# Altium PCB TEC_Laser.PcbDoc
Units mil, origin at the board's own origin, x right, y up, seen from the top; angles counter-clockwise.
Board outline 826.77 x 1181.1 mil, 2 copper layers (Top Layer, Bottom Layer), stack 61.756 mil thick; 48 components, 34 nets, 140 pads, 41 vias.
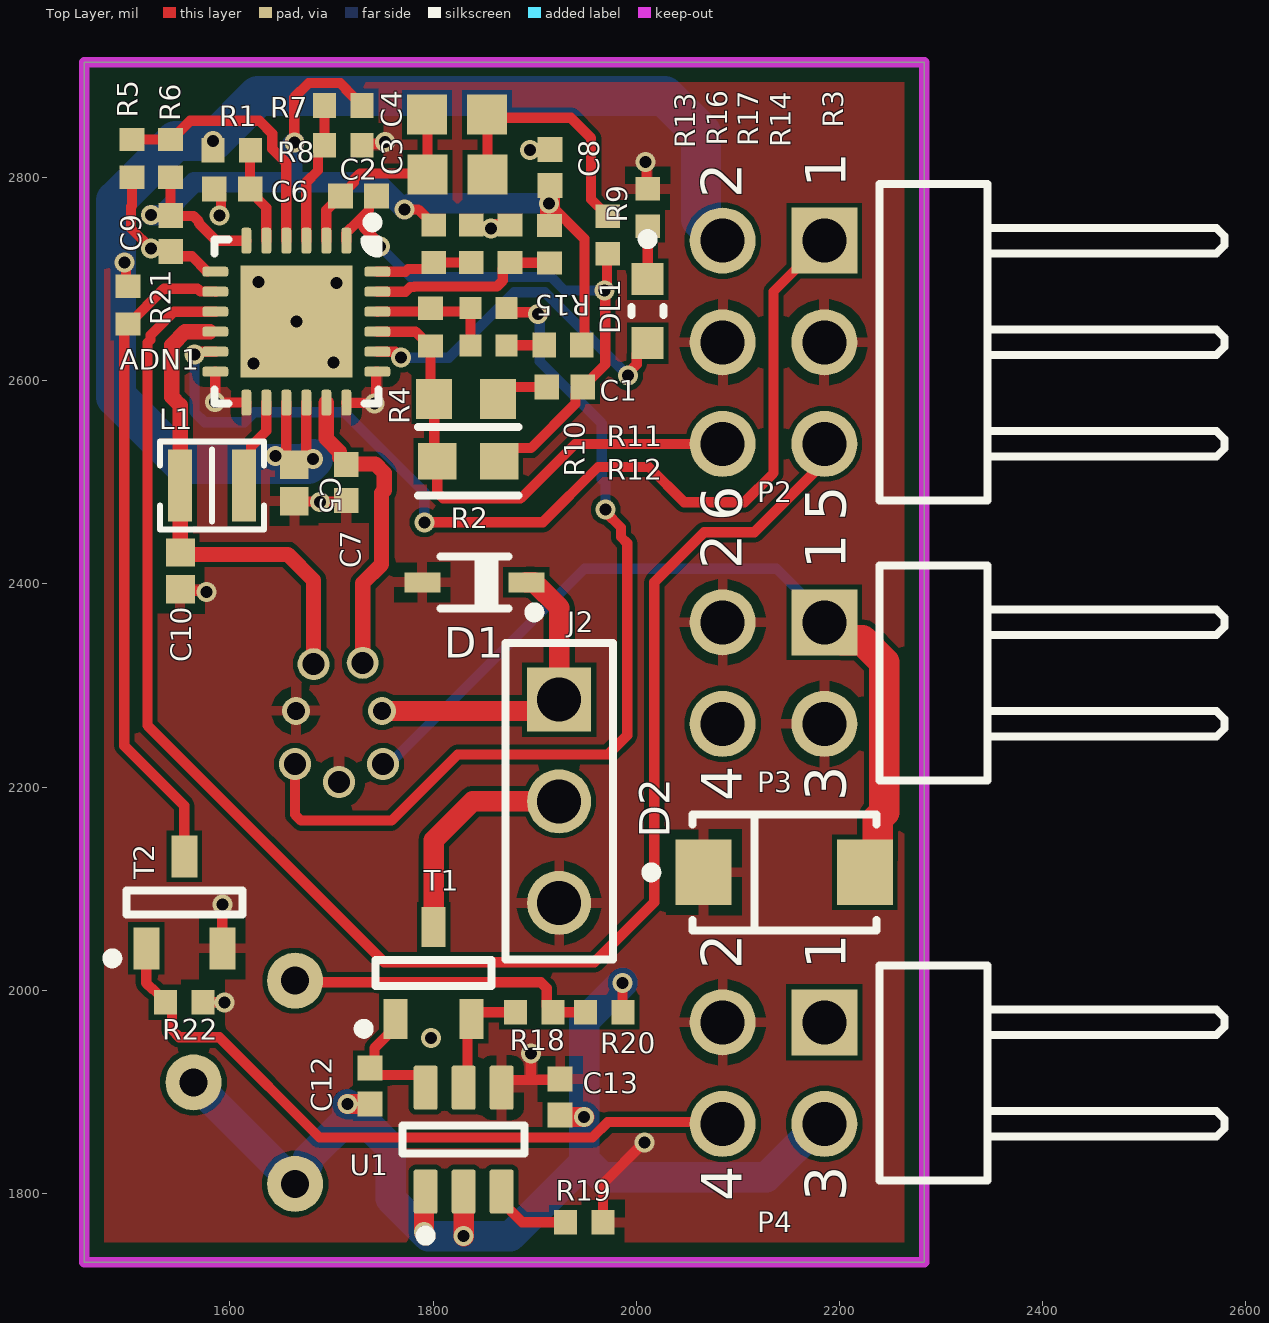
[diagram p0: Top Layer view]
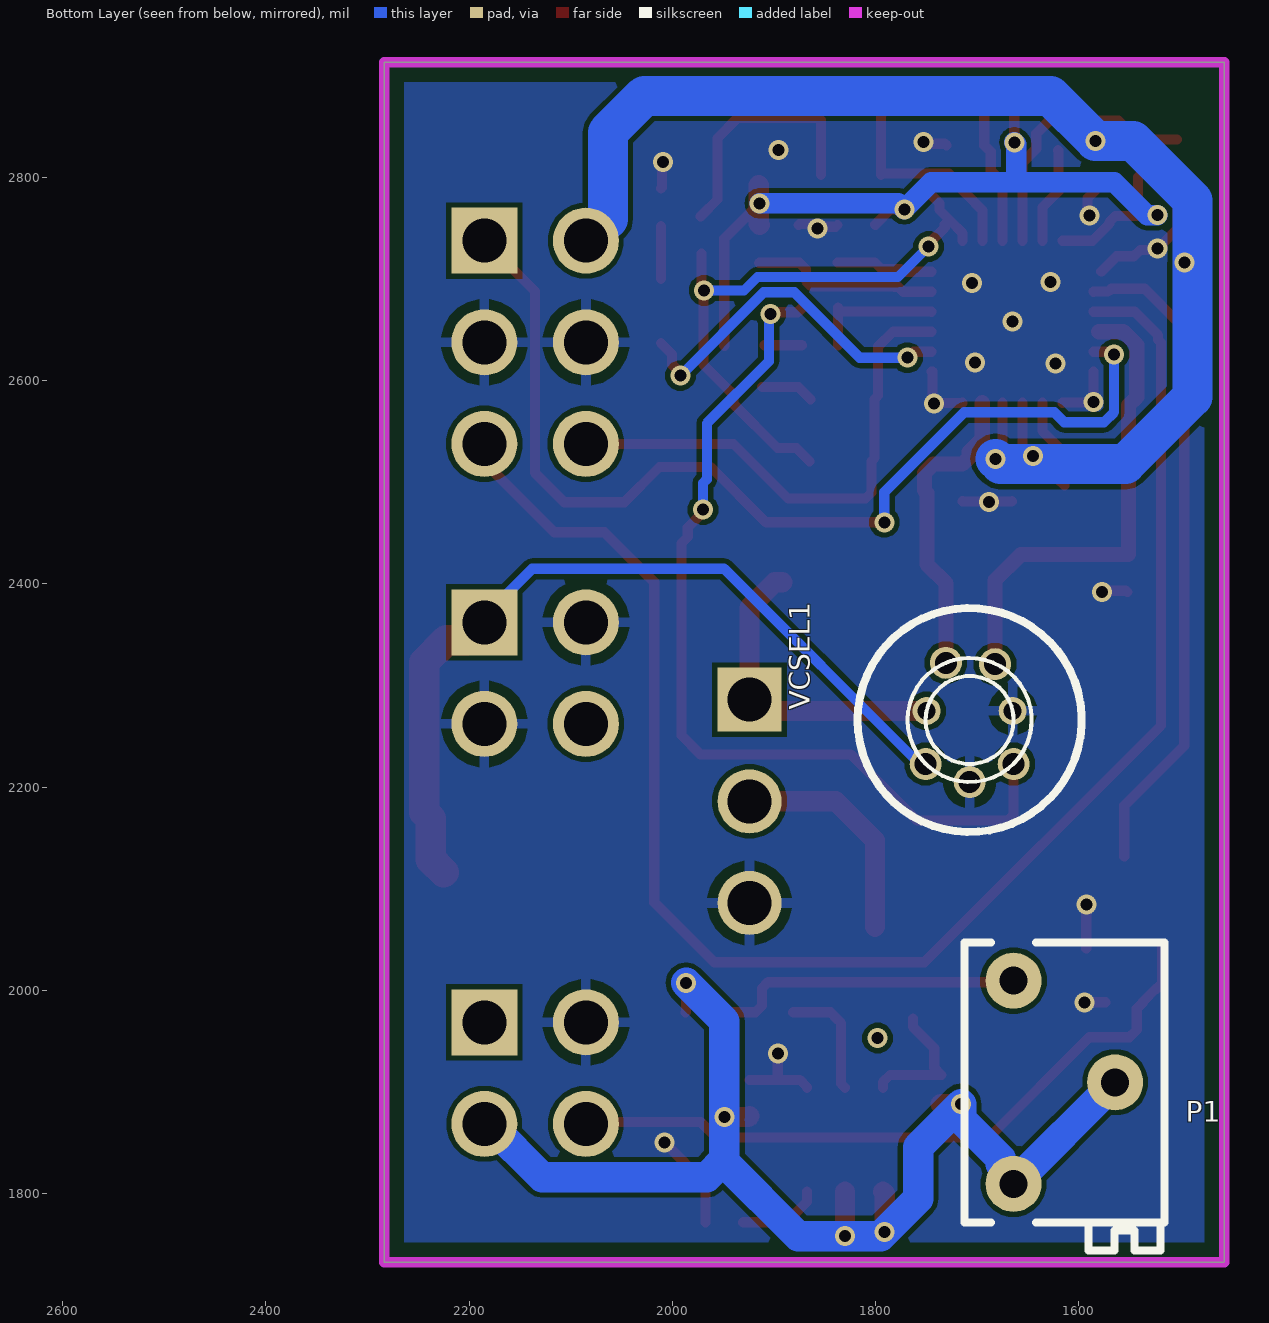
[diagram p1: Bottom Layer view, seen from below]
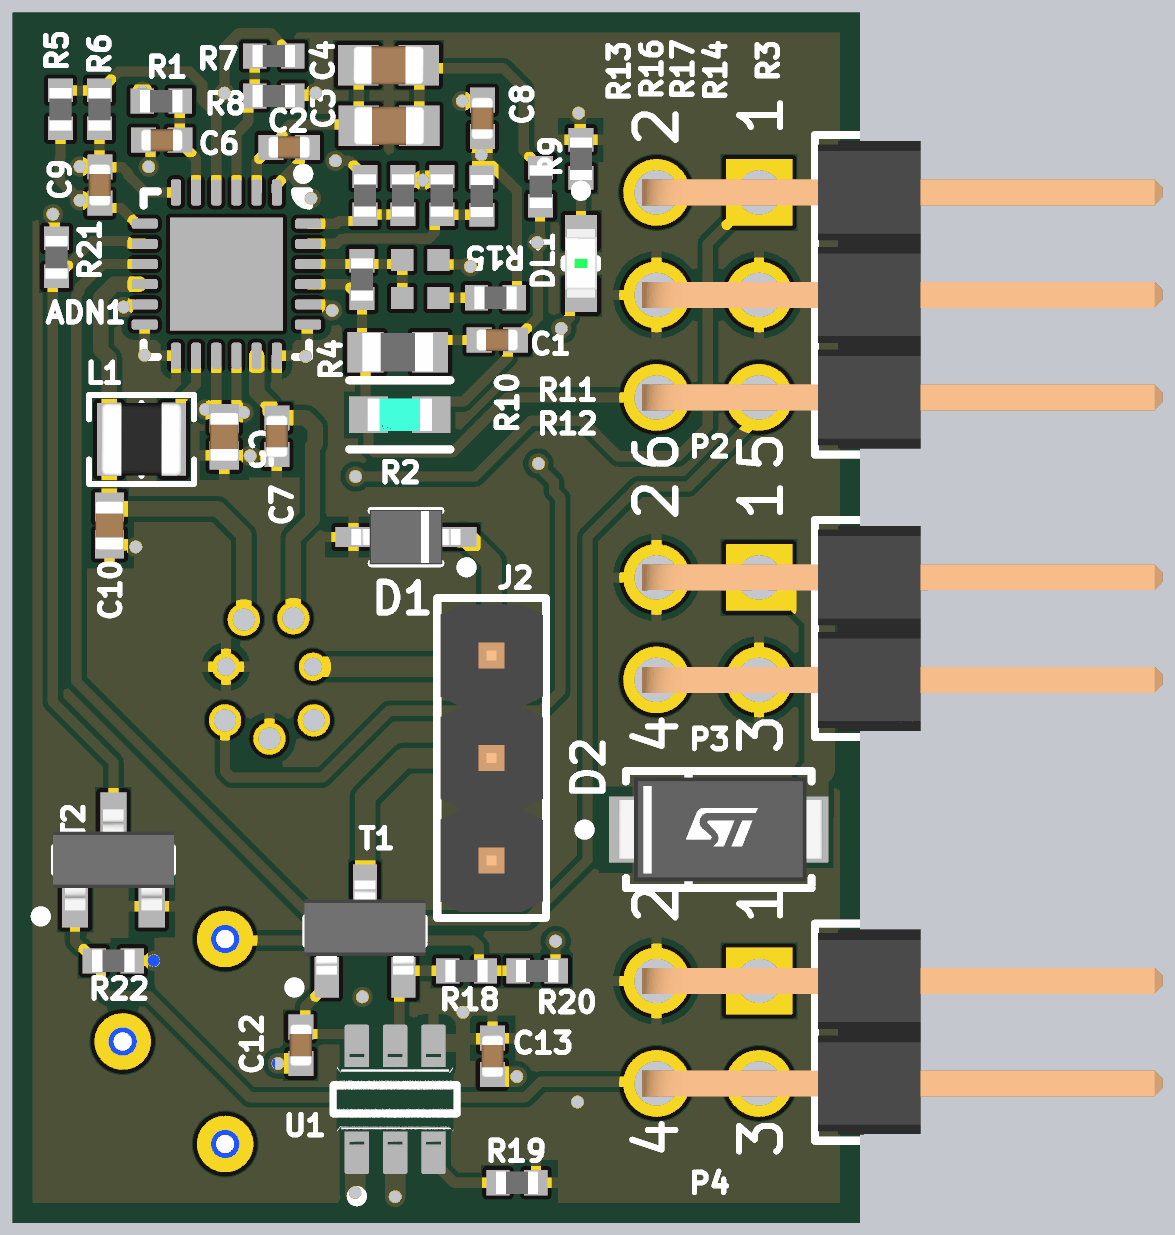
[diagram p2: 3D render of the assembled board from above, using the file's embedded part models]

## Layer stack, top to bottom
Top Solder: solder mask 1, SM-001, Dk 4
Top Layer: signal copper 1.378
Dielectric 1: core 59, Core-043, Dk 4.3
Bottom Layer: signal copper 1.378
Bottom Solder: solder mask 1, SM-001, Dk 4

## Board outline
1456.69,1732.28 1456.69,2913.39 2283.46,2913.39 2283.46,1732.28

## Design rules (kind name [scope] priority, off if disabled: settings)
Clearance [All] p1: gap=5 ignorepadtopadclearanceinfootprint=FALSE except(0: Arc-Hole Track-Hole SMDPad-Hole THPad-Hole Via-Hole Fill-Hole Poly-Hole Region-Hole Text-Hole)
PlaneConnect [All] p1: pad.planeconnectstyle=Relief pad.reliefexpansion=20 pad.reliefentries=4 pad.reliefconductorwidth=10 pad.reliefairgap=10 via.planeconnectstyle=Direct via.reliefexpansion=20 via.reliefentries=4 via.reliefconductorwidth=10 via.reliefairgap=10
PolygonConnect [All] p1: thpad.connectstyle=Relief thpad.reliefconductorwidth=10 thpad.reliefentries=4 thpad.polygonreliefangle="90 Angle" thpad.airgapwidth=10 smdpad.connectstyle=Relief smdpad.reliefconductorwidth=10 smdpad.reliefentries=4 smdpad.polygonreliefangle="90 Angle" smdpad.airgapwidth=10 via.connectstyle=Direct via.reliefconductorwidth=10 via.reliefentries=4 via.polygonreliefangle="90 Angle" via.airgapwidth=10
RoutingVias [All] p1: holewidth=11.81 width=19.68 viastyle="Through Hole" minholewidth=11.81 minwidth=19.68 maxholewidth=28 maxwidth=50
SolderMaskExpansion [All] p1: expansion=4 istentingtop=FALSE
Width [All] p1: maxlimit=109 minlimit=10 preferedwidth=10
29 further rules are at their usual default settings.

## Components (designator, comment, footprint, x,y, rotation, side; value= is the part's Value field where it differs from the comment)
ADN1 "ADN8834" "SMSC QFN-24 4x4MM" 1665.32,2658.08 r270 top
C1 "10nF" CAPC1005X55N 1929.53,2593.8 r180 top
C2 "10nF" CAPC1005X55N 1726.53,2781.8 r0 top
C3 "10uF" CAPC1608X80N 1824.06,2802.8 r0 top
C4 "10uF" CAPC1608X80N 1823.53,2861.8 r0 top
C5 "10uF" CAPC1005X70N 1663.26,2499.37 r90 top
C6 "100nF" CAPC1005X55N 1602.31,2788.72 r180 top
C7 "100nF" CAPC1005X55N 1714.53,2499.8 r90 top
C8 "100nF" CAPC1005X55N 1915,2810 r90 top
C9 "100nF" CAPC1005X55N 1541.84,2744.97 r270 top
C10 "10uF" CAPC1005X70N 1551.27,2412.79 r90 top
C12 "100nF" CAPC1005X55N 1737.98,1905.88 r270 top
C13 "100nF" CAPC1005X55N 1925,1895 r90 top
D1 "PESD5V0S1UA" SOD2512X110N 1840.55,2401.57 r180 top
D2 "SMA6J20A-TR" FP-SMA-MFG 2145.67,2116.14 r0 top
DL1 "Green" LED_OSRAM_LGL29K 2011.2,2668.53 r270 top
J2 "61300311121" 61300311121 1924,2186 r270 top
L1 "1µH" "IND 0806_2016" 1582.53,2496.8 r180 top
P1 "1k" TRIM_VISHAY_T63XB 1614.17,1909.45 r270 bottom
P2 "61300621021" 61300621021 2292.52,2637.8 r90 top
P3 "61300421021" 61300421021 2292.52,2312.2 r90 top
P4 "61300421021" 61300421021 2292.52,1918.5 r90 top
R1 "10" RESC1005X40N 1601.82,2826.8 r180 top
R2 "RN731JTTD6572C50" FP-RN731J-IPC_B 1834.53,2520.8 r180 top
R3 "100k" RESC1005X40N 1971.97,2743.44 r270 top
R4 "374k" RESC1608X55N 1832.53,2581.8 r180 top
R5 "8k2" RESC1005X40N 1503.53,2818.8 r90 top
R6 "9k1" RESC1005X40N 1541.53,2818.8 r90 top
R7 "2k" RESC1005X40N 1711.53,2870.8 r0 top
R8 "330" RESC1005X40N 1711.53,2831.8 r180 top
R9 "1k" RESC1005X40N 2011.2,2770.53 r90 top
R10 "15k" RESC1005X40N 1797.53,2652.8 r90 top
R11 "CPF0402B7K68E1" RESC1005X35X20NL05T10 1854.53,2671.8 r0 top
R12 "CPF0402B7K68E1" RESC1005X35X20NL05T10 1854.53,2634.8 r180 top
R13 "20k" RESC1005X40N 1800.53,2734.8 r90 top
R14 "20k" RESC1005X40N 1914.53,2734.31 r90 top
R15 "10k" RESC1005X40N 1927.83,2635.02 r180 top
R16 "20k" RESC1005X40N 1837.53,2734.8 r270 top
R17 "20k" RESC1005X40N 1875.53,2734.8 r270 top
R18 "100" RESC1005X40N 1899.61,1978.35 r180 top
R19 "10k" RESC1005X40N 1948.82,1771.65 r180 top
R20 "1k2" RESC1005X40N 1968.5,1978.35 r180 top
R21 "100k" RESC1005X40N 1499.65,2674.4 r90 top
R22 "100k" RESC1005X40N 1555.12,1988.19 r180 top
T1 "BC847B" SOT95P230X110-3N 1800.6,2017.28 r90 top
T2 "BSS138LT1G" SOT95P240X110-3N 1555.12,2086.61 r90 top
U1 "REF3425QDBVRQ1" FP-DBV0006A-MFG 1830,1853 r90 top
VCSEL1 "VCSEL_BW10" VCSEL_BW10 1736.89,2216.78 r0 bottom

## Footprints (in the part's own frame and the unit in brackets; to place one, negate y for a bottom-side part, rotate by r counter-clockwise, add the part's x,y. Pads: shape width x height; smd on the part's side, far side on the other; paste and mask are expansions set on the pad)
61300311121 [mm] "Pin Header, pitch 2.54 mm, THT, Vertical, single row, 3p"
  rect 1.6x1.6 hole 1.1: 1(-2.54,0)
  round 1.6 hole 1.1: 2(0,0) 3(2.54,0)
  silkscreen extent -3.96,-1.35 3.96,1.35, body extent -3.81,-1.27 3.81,1.27, height 8.57
61300421021 [mm] "Pin Header, pitch 2.54 mm, THT, Angled, dual row, 4p"
  rect 1.65x1.65 hole 1.1: 1(1.27,2.73)
  round 1.65 hole 1.1: 2(1.27,5.27) 3(-1.27,2.73) 4(-1.27,5.27)
  silkscreen extent -2.69,-7.27 2.69,1.35, body extent -2.54,-7.27 2.54,5.63, height 5.12
61300621021 [mm] "Pin Header, pitch 2.54 mm, THT, Angled, dual row, 6p"
  rect 1.65x1.65 hole 1.1: 1(2.54,2.73)
  round 1.65 hole 1.1: 2(2.54,5.27) 3(0,2.73) 4(0,5.27) 5(-2.54,2.73) 6(-2.54,5.27)
  silkscreen extent -3.96,-7.27 3.96,1.35, body extent -3.81,-7.27 3.81,5.63, height 5.12
CAPC1005X55N [mm] "Capacitor, Non-Polarized, Chip; 1.00mm L X 0.50mm W X 0.70mm H, IPC Medium Density"
  rect 0.62x0.62 smd: 1(-0.45,0) 2(0.45,0)
  body extent -0.52,-0.27 0.53,0.28, height 0.55
CAPC1005X70N [mm] "Capacitor, Non-Polarized, Chip; 1.00mm L X 0.50mm W X 0.70mm H, IPC Medium Density"
  rect 0.71x0.72 smd: 1(-0.46,0) 2(0.46,0)
  body extent -0.6,-0.35 0.6,0.35, height 0.7
CAPC1608X80N [mm] "Chip Capacitor, Body 1.6x0.8mm IPC Medium Density"
  rect 1x1 smd: 1(-0.75,0) 2(0.75,0)
  body extent -0.87,-0.47 0.88,0.48, height 0.8
FP-DBV0006A-MFG [mm]
  rrect17% 1.1x0.6 smd paste+0 mask+0: 1(-1.3,0.95) 2(-1.3,0) 3(-1.3,-0.95) 4(1.3,-0.95) 5(1.3,0) 6(1.3,0.95)
  silkscreen extent -2.52,-1.53 0.35,1.53, body extent -1.95,-1.78 1.95,1.78, height 0.25
FP-RN731J-IPC_B [mil]
  rect 37.62x35.91 smd paste+0 mask+0: 1(-30.52,0) 2(30.52,0)
  silkscreen extent -49,-34 49,34, body extent -59,-28 59,28, height 10
FP-SMA-MFG [mm]
  rect 1.4x1.64 smd paste+0 mask+0: 1(-2.015,0) 2(2.015,0)
  silkscreen extent -3.45,-1.45 2.3,1.45, body extent -2.82,-1.55 2.82,1.55, height 0.25
"IND 0806_2016" [mm] "Chip Capacitor, 2-Leads, Body 2.00x1.20mm, IPC Medium Density"
  rect 0.6x1.8 smd: 1(-0.8,0) 2(0.8,0)
  silkscreen extent -1.3,-1.1 1.3,1.1, body extent -1.01,-0.91 1.01,0.91, height 1.81
LED_OSRAM_LGL29K [mm] "Green Chip LED, 2-Leads, Body 1.7x0.8mm, IPC Medium Density"
  rect 0.8x0.8 smd: 1(-0.8,0) 2(0.8,0)
  silkscreen extent -1.92,-0.4 0.1,0.4, body extent -0.85,-0.4 0.85,0.4, height 0.67
RESC1005X35X20NL05T10 [mm] "Chip Resistor, 2-Leads, Body 1.00x0.50mm, IPC Medium Density"
  rect 0.55x0.55 smd: 1(-0.45,0) 2(0.45,0)
  body extent -0.53,-0.27 0.53,0.28, height 0.35
RESC1005X40N [mm] "Chip Resistor, EIA 0402, Metric 1005, Body 1.0x0.5mm, IPC Medium Density"
  rect 0.58x0.62 smd: 1(-0.47,0) 2(0.47,0)
  body extent -0.52,-0.27 0.53,0.28, height 0.4
RESC1608X55N [mm] "Chip Resistor, EIA 0603, Metric 1608, Body 1.6x0.8mm, IPC Medium Density"
  rect 0.9x1 smd: 1(-0.8,0) 2(0.8,0)
  body extent -0.87,-0.47 0.88,0.48, height 0.55
"SMSC QFN-24 4x4MM" [mm] "QFN, 24-Leads, Body 4.1x4.1mm (max), Pitch 0.50mm, IPC Medium Density"
  rrect50% 0.65x0.25 smd: 1(-2.025,1.25) 2(-2.025,0.75) 3(-2.025,0.25) 4(-2.025,-0.25) 5(-2.025,-0.75) 6(-2.025,-1.25) 13(2.025,-1.25) 14(2.025,-0.75) 15(2.025,-0.25) 16(2.025,0.25) 17(2.025,0.75) 18(2.025,1.25)
  rrect50% 0.25x0.65 smd: 7(-1.25,-2.025) 8(-0.75,-2.025) 9(-0.25,-2.025) 10(0.25,-2.025) 11(0.75,-2.025) 12(1.25,-2.025) 19(1.25,2.025) 20(0.75,2.025) 21(0.25,2.025) 22(-0.25,2.025) 23(-0.75,2.025) 24(-1.25,2.025)
  rect 2.8x2.8 smd: 25(0,0)
  silkscreen extent -2.61,-2.05 2.05,2.05, body extent -2.05,-2.05 2.05,2.05, height 0.95
SOD2512X110N [mm] "Small Outline Diode (SOD-323), 1.70mm W X 1.25mm L X 1.10mm H body,  IPC Medium Density"
  rect 0.9x0.5 smd: 1(-1.3,0) 2(1.3,0)
  silkscreen extent -1.63,-0.65 0.85,0.87, body extent -1.35,-0.67 1.35,0.68, height 1.1
SOT95P230X110-3N [mm] "SOT23, 3 pin, Pitch 0.95mm - 1.3mm W X 2.9mm L X 1.1mm H, IPC Medium Density"
  rect 1x0.6 smd: 1(-1.15,0.95) 2(-1.15,-0.95) 3(1.15,0)
  silkscreen extent -1.52,-1.45 0.33,1.87, body extent -1.08,-1.5 1.25,1.5, height 1.1
SOT95P240X110-3N [mm] "SOT23 3-Leads, Pitch 0.95mm, Body 1.3x2.9mm, IPC Medium Density"
  rect 1.05x0.65 smd: 1(-1.15,0.95) 2(-1.15,-0.95) 3(1.15,0)
  silkscreen extent -1.52,-1.45 0.3,1.92, body extent -1.25,-1.5 1.25,1.5, height 1.1
TRIM_VISHAY_T63XB [mm] "Trimming Potentiometer VISHAY T63YB Series (Side Adjustment)"
  round 1.4 hole 0.7: 1(-2.54,-1.27) 2(0,1.27) 3(2.54,-1.27)
  silkscreen extent -3.5,-2.5 4.2,2.5, body extent -3.5,-2.5 4.2,2.5, height 7
VCSEL_BW10 [mm]
  round 0.8 hole 0.55: 1(-0.157,-2.682) 3(0.35,-0.15) 4(-0.75,0.3) 5(-1.85,-0.15) 7(-1.385,-2.647)
  round 0.7 hole 0.45: 2(0.326,-1.479) 6(-1.826,-1.479)
  silkscreen extent -3.55,-4.05 2.05,1.55

## Part data
ADN1: "TEC"
C1 C2: library part CC0402_10NF_16V_10%_X7R, "Non-polarised capacitor", Case=0402, Manufacturer=GENERIC, Manufacturer1 ComponentHeight=0.55mm, Manufacturer1 Example=PHYCOMP, Manufacturer1 Part Number=223878715636, Tolerance=±10%, Voltage=16V, Author="CERN DEM JLC", Component Type=Standard, CreateDate=03.12.2007, HelpURL=\\cern.ch\dfs\Applications\Altium\Datasheets\CC0402_X7R_PHYCOMP.pdf, LatestRevisionDate=03.12.2007, Manufacturer Part Number=CC0402_10NF_16V_10%_X7R, Mounted=Yes, Part Description="SMD Multilayer Chip Ceramic Capacitor", Part Number=CC0402_10NF_16V_10%_X7R, Pin Count=2, Sense=No, SMD=Yes, Socket=No, Status="Not Recommended", TC=X7R
C3 C4: library part CC0603_10UF_16V_20%_X5R, "Non-polarised capacitor", Case=0603, Manufacturer=GENERIC, Manufacturer1 ComponentHeight=0.8mm, Manufacturer1 Example=MURATA, Manufacturer1 Part Number=GRM188R61C106MA73D, Tolerance=±20%, Voltage=16V, Author="CERN DEM MR", Component Type=Standard, CreateDate=02.03.2016, HelpURL=\\cern.ch\dfs\Applications\Altium\Datasheets\CC0603_X5R_MURATA_GRM.pdf, LatestRevisionDate=02.03.2016, Manufacturer Part Number=CC0603_10UF_16V_20%_X5R, Mounted=Yes, Part Description="SMD Multilayer Chip Ceramic Capacitor", Part Number=CC0603_10UF_16V_20%_X5R, Pin Count=2, Sense=No, SMD=Yes, Socket=No, Status=None, TC=X5R
C5 C10: library part CC0402_10UF_6.3V_20%_X5R, "Non-polarised capacitor", Case=0402, Manufacturer=GENERIC, Manufacturer1 ComponentHeight=0.70mm, Manufacturer1 Example=TDK, Manufacturer1 Part Number=C1005X5R0J106M050BC, Tolerance=±10%, Voltage=6.3V, Author="CERN DEM JLC", Component Type=Standard, CreateDate=07.01.2015, HelpURL=\\cern.ch\dfs\Applications\Altium\Datasheets\CC0402_X5R_TDK_C.pdf, LatestRevisionDate=07.01.2015, Manufacturer Part Number=CC0402_10UF_6.3V_20%_X5R, Mounted=Yes, Part Description="SMD Multilayer Chip Ceramic Capacitor", Part Number=CC0402_10UF_6.3V_20%_X5R, Pin Count=2, Sense=No, SMD=Yes, Socket=No, Status=Preferred, TC=X5R
C6 C7 C8 C9 C12 C13: library part CC0402_100NF_16V_10%_X7R, "Non-polarised capacitor", Case=0402, Manufacturer=GENERIC, Manufacturer1 ComponentHeight=0.55mm, Manufacturer1 Example=MURATA, Manufacturer1 Part Number=GRM155R71C104KA88D, Tolerance=±10%, Voltage=16V, Author="CERN DEM JLC", Component Type=Standard, CreateDate=05.12.2013, HelpURL=\\cern.ch\dfs\Applications\Altium\Datasheets\CC0402_X7R_MURATA_GRM.pdf, LatestRevisionDate=03.12.2007, Manufacturer Part Number=CC0402_100NF_16V_10%_X7R, Mounted=Yes, Part Description="SMD Multilayer Chip Ceramic Capacitor", Part Number=CC0402_100NF_16V_10%_X7R, Pin Count=2, Sense=No, SMD=Yes, Socket=No, Status="Not Recommended", TC=X7R
D1: "Transient Voltage Suppressor Diode (Uni-Directional)", Case=SOD-323, Manufacturer="NXP SEMICONDUCTORS", Power=890W, Voltage=5V, Author="CERN DEM JLC", Bonding=No, Component Type=Standard, ComponentHeight=1.1mm, CreateDate=28.08.2012, Device=PESD5V0S1UA, HelpURL=\\cern.ch\dfs\Applications\Altium\Datasheets\PESD5V0S1UA.pdf, LatestRevisionDate=18.09.2013, Manufacturer Part Number=PESD5V0S1UA, Mounted=Yes, PackageDescription="Small Outline Diode (SOD-323), 1.70mm W X 1.25mm L X 1.10mm H body,  IPC Medium Density", Part Description="Unidirectional ESD Protection for Transient Voltage Suppression", Part Number=PESD5V0S1UA, Pin Count=2, PressFit=No, Sense=No, SMD=Yes, Socket=No
D2: library part CMP-12225-000059-1, "TVS DIODE 20V 36.8V SMA", Breakdown Voltage=23.4V, Case/Package=SMA, Clamping Voltage=36.8V, Leakage Current=200nA, Max Breakdown Voltage=24.5V, Max Operating Temperature=175°C, Max Power Dissipation=4W, Max Surge Current=60A, Min Breakdown Voltage=22.2V, Min Operating Temperature=-55°C, Operating Supply Voltage=20V, Package Quantity=1, Peak Pulse Current=93A, Peak Pulse Power=600W, Power Line Protection=No, Test Current=1mA, Composition=Zener, Direction=Unidirectional, Element Configuration=Single, Height=2.03mm, Lead Free="Lead Free", Length=4.6mm, Max Reverse Leakage Current=200nA, Mount="Surface Mount", Number of Channels=1, Number of Elements=1, Number of Pins=2, Number of Unidirectional Channels=1, Packaging="Tape and Reel", Polarity=Unidirectional, Power Dissipation=600W, Radiation Hardening=No, REACH SVHC="No SVHC", Reverse Breakdown Voltage=22.2V, Reverse Standoff Voltage=20V, Termination=SMD/SMT, Width=2.9mm
DL1: library part "LED_OSRAM_LG L29K-G2J1-24-Z", "LED Green 1C 2A", Case=0603, Manufacturer=OSRAM, Manufacturer Part Number="LG L29K-G2J1-24-Z", Author="CERN DEM JLC", Bonding=No, Color=Green, Component Type=Standard, ComponentHeight=0.67mm, CreateDate=24.04.2012, HelpURL=\\cern.ch\dfs\Applications\Altium\Datasheets\LED_OSRAM_LGL29K.pdf, LatestRevisionDate=24.04.2012, Mounted=Yes, PackageDescription="Green Chip LED, 2-Leads, Body 1.7x0.8mm, IPC Medium Density", Part Description="Surface Mount Green LED (0603 Case)", Part Number="LED_OSRAM_LG L29K-G2J1-24-Z", Pin Count=2, PressFit=No, Sense=No, SMD=Yes, Socket=No, Status="Not Recommended", Status Comment="Sourcing Difficulty"
J2: "WR-PHD Pin Header, THT, pitch 2.54mm, Single Row, Vertical, 3pin", Contact Resistance=20mOhm, Operating Temperature="-40 to +105degC", Rated Current=3A, Withstanding Voltage=500VAC, Working Voltage=250VAC, ComponentLink1Description=Manufacturer, ComponentLink1URL=http://www.we-online.de, ComponentLink2Description=Datasheet, ComponentLink2URL=https://katalog.we-online.de/em/datasheet/6130xx11121.pdf, Gender=Male, Mounting Technology=THT, Orientation=Vertical, Packaging=Bag, Part Number=61300311121, Pin Number=3, Pitch=2.54mm, Published Date="June 2019", Publisher="Wurth Elektronik", Row Number=Single
L1: library part SDED20161T-1R0MS, "FIXED IND 1UH 1.7A 107MOHM SMD", Current - Saturation=1.8A, Current Rating (Amps)=1.7A, DC Resistance (DCR)="107mOhm Max", Device Package="0806 (2016 Metric)", Inductance Frequency - Test=1MHz, Manufacturer="Delta Electronics/Cyntec", Operating Temperature="-55°C ~ 125°C", Supplier Device Package=0806, Supplier Part Number 1=2037-SDED20161T-1R0MSCT-ND, Tolerance=±20%, ComponentLink1Description=Datasheet, ComponentLink1URL=http://www.cyntec.com/upfile/products/download/SDED20161T-000%20(A6).pdf, ComponentLink2Description="DigiKey Link", ComponentLink2URL=http://digikey.com/product-detail/en/delta-electronics-cyntec/SDED20161T-1R0MS/2037-SDED20161T-1R0MSCT-ND/10315404, Height - Seated (Max)="0.039\" (1.00mm)", Inductance=1µH, LastUpdated="02.09.2020 01:24:38", Lifecycle Status=Active, Material - Core="0806 (2016 Metric)", Minimum Order=1, Mounting Type="Surface Mount", Package / Case="0806 (2016 Metric)", Packaging=TapeAndReel, Part Number=SDED20161T-1R0MS, Part Status=Active, PartId=2787, Price=0.09, Series=SDED20161T, Shielding=Shielded, Size / Dimension="0.079\" L x 0.063\" W (2.00mm x 1.60mm)", Supplier 1=DigiKey
P1: library part TRIM_14T_1K_VISHAY_T63XB102KT20, "Trimming Potentiometer", Case=T63XB, Manufacturer="VISHAY SFERNICE", Manufacturer Part Number=T63XB102KT20, Power=0.25W, Tolerance=±10%, Author="CERN DEM JLC", Component Type=Standard, ComponentHeight=7mm, CreateDate=16.10.2013, HelpURL=\\cern.ch\dfs\Applications\Altium\Datasheets\TRIM_VISHAY_T63XB.pdf, LatestRevisionDate=16.10.2013, Mounted=Yes, Part Description="15 Turn ± 5 Trimming Potentiometer (Side Adjustment)", Part Number=TRIM_14T_1K_VISHAY_T63XB102KT20, Pin Count=3, PressFit=No, Sense=No, SMD=No, Socket=No, TC=±100ppm/°C
P2: "WR-PHD Pin Header, THT, pitch 2.54mm, Dual Row, Angled, 6p", Contact Resistance=20mOhm, Manufacturer="Wurth Elektronik", Operating Temperature="-40 to +105degC", Rated Current=3A, Withstanding Voltage=500VAC, Working Voltage=250VAC, ComponentLink1Description=Manufacturer, ComponentLink1URL=http://www.we-online.de, ComponentLink2Description=Datasheet, ComponentLink2URL=https://www.we-online.com/catalog/datasheet/61300621021.pdf, Gender="Pin Header", Manufacturer Part Number=61300621021, Mounting Technology=THT, Orientation=Angled, Packaging=Bag, Pin Number=6, Pitch=2.54mm, Published Date="May 2020", Row Number=Dual
P3 P4: "WR-PHD Pin Header, THT, pitch 2.54mm, Dual Row, Angled, 4p", Contact Resistance=20mOhm, Manufacturer="Wurth Elektronik", Operating Temperature="-40 to +105degC", Rated Current=3A, Withstanding Voltage=500VAC, Working Voltage=250VAC, ComponentLink1Description=Manufacturer, ComponentLink1URL=http://www.we-online.de, ComponentLink2Description=Datasheet, ComponentLink2URL=https://www.we-online.com/catalog/datasheet/61300421021.pdf, Gender="Pin Header", Manufacturer Part Number=61300421021, Mounting Technology=THT, Orientation=Angled, Packaging=Bag, Pin Number=4, Pitch=2.54mm, Published Date="May 2020", Row Number=Dual
R1: library part R0402_10R_1%_0.0625W_200PPM, "Resistor - 1%", Case=0402, Manufacturer=GENERIC, Manufacturer1 ComponentHeight=0.4mm, Manufacturer1 Example="YAGEO PHYCOMP", Manufacturer1 Part Number=232270671009L, Power=0.0625W, Tolerance=±1%, Author="CERN DEM JLC", Component Type=Standard, CreateDate=24.06.2009, HelpURL=\\cern.ch\dfs\Applications\Altium\Datasheets\R0402_Phycomp_RC0402.pdf, LatestRevisionDate=17.10.2012, Manufacturer Part Number=R0402_10R_1%_0.0625W_200PPM, Mounted=Yes, Part Description="General Purpose Thick Film Chip Resistor", Part Number=R0402_10R_1%_0.0625W_200PPM, Pin Count=2, PressFit=No, Sense=No, SMD=Yes, Socket=No, Status="Not Recommended", TC=±200ppm/°C
R2: library part CMP-04015-036220-1, "65.7kΩ ±0.25% 0.063W, 1/16W Chip Resistor 0603 (1608 Metric) Moisture Resistant Thin Film", Case Code (Imperial)=0603, Case Code (Metric)=1608, Max Operating Temperature=125°C, Min Operating Temperature=-55°C, Power Rating=63mW, Resistance=65.7kR, Temperature Coefficient=50ppm/°C, Tolerance=0.25%, Voltage Rating=50V, Case/Package=0603, Composition="Thin Film", Height=0.45mm, Length=1.6mm, Packaging="Tape and Reel", Termination=SMD/SMT, Weight=7.1E-05oz, Width=0.8mm
R3 R21 R22: library part R0402_100K_1%_0.0625W_100PPM, "Resistor - 1%", Case=0402, Manufacturer=GENERIC, Manufacturer1 ComponentHeight=0.4mm, Manufacturer1 Example="YAGEO PHYCOMP", Manufacturer1 Part Number=232270671004L, Power=0.0625W, Tolerance=±1%, Author="CERN DEM JLC", Component Type=Standard, CreateDate=03.12.2007, HelpURL=\\cern.ch\dfs\Applications\Altium\Datasheets\R0402_Phycomp_RC0402.pdf, LatestRevisionDate=17.10.2012, Manufacturer Part Number=R0402_100K_1%_0.0625W_100PPM, Mounted=Yes, Part Description="General Purpose Thick Film Chip Resistor", Part Number=R0402_100K_1%_0.0625W_100PPM, Pin Count=2, PressFit=No, Sense=No, SMD=Yes, Socket=No, Status="Not Recommended", TC=±100ppm/°C
R4: library part R0603_374K_0.1%_0.063W_25PPM, "Resistor - 0.1%", Case=0603, Manufacturer=GENERIC, Manufacturer1 ComponentHeight=0.55mm, Manufacturer1 Example="TYCO ELECTRONICS", Manufacturer1 Part Number=CPF0603B374KE1, Power=0.063W, Tolerance=±0.1%, Author="CERN DEM JLC", Component Type=Standard, CreateDate=12.01.2011, HelpURL=\\cern.ch\dfs\Applications\Altium\Datasheets\R0603_TYCO_CPF.pdf, LatestRevisionDate=12.01.2011, Manufacturer Part Number=R0603_374K_0.1%_0.063W_25PPM, Mounted=Yes, Part Description="Thin Film Chip Resistor", Part Number=R0603_374K_0.1%_0.063W_25PPM, Pin Count=2, PressFit=No, Sense=No, SMD=Yes, Socket=No, Status="Not Recommended", TC=±25ppm
R5: library part R0402_8K2_1%_0.0625W_100PPM, "Resistor - 1%", Case=0402, Manufacturer=GENERIC, Manufacturer1 ComponentHeight=0.4mm, Manufacturer1 Example="YAGEO PHYCOMP", Manufacturer1 Part Number=232270678202L, Power=0.0625W, Tolerance=±1%, Author="CERN DEM JLC", Component Type=Standard, CreateDate=03.12.2007, HelpURL=\\cern.ch\dfs\Applications\Altium\Datasheets\R0402_Phycomp_RC0402.pdf, LatestRevisionDate=17.10.2012, Manufacturer Part Number=R0402_8K2_1%_0.0625W_100PPM, Mounted=Yes, Part Description="General Purpose Thick Film Chip Resistor", Part Number=R0402_8K2_1%_0.0625W_100PPM, Pin Count=2, PressFit=No, Sense=No, SMD=Yes, Socket=No, Status="Not Recommended", TC=±100ppm/°C
R6: library part R0402_9K1_1%_0.0625W_100PPM, "Resistor - 1%", Case=0402, Manufacturer=GENERIC, Manufacturer1 ComponentHeight=0.4mm, Manufacturer1 Example="YAGEO PHYCOMP", Manufacturer1 Part Number=232270679102L, Power=0.0625W, Tolerance=±1%, Author="CERN DEM JLC", Component Type=Standard, CreateDate=03.12.2007, HelpURL=\\cern.ch\dfs\Applications\Altium\Datasheets\R0402_Phycomp_RC0402.pdf, LatestRevisionDate=17.10.2012, Manufacturer Part Number=R0402_9K1_1%_0.0625W_100PPM, Mounted=Yes, Part Description="General Purpose Thick Film Chip Resistor", Part Number=R0402_9K1_1%_0.0625W_100PPM, Pin Count=2, PressFit=No, Sense=No, SMD=Yes, Socket=No, Status="Not Recommended", TC=±100ppm/°C
R7: library part R0402_2K_1%_0.0625W_100PPM, "Resistor - 1%", Case=0402, Manufacturer=GENERIC, Manufacturer1 ComponentHeight=0.4mm, Manufacturer1 Example="YAGEO PHYCOMP", Manufacturer1 Part Number=232270672002L, Power=0.0625W, Tolerance=±1%, Author="CERN DEM JLC", Component Type=Standard, CreateDate=03.12.2007, HelpURL=\\cern.ch\dfs\Applications\Altium\Datasheets\R0402_Phycomp_RC0402.pdf, LatestRevisionDate=17.10.2012, Manufacturer Part Number=R0402_2K_1%_0.0625W_100PPM, Mounted=Yes, Part Description="General Purpose Thick Film Chip Resistor", Part Number=R0402_2K_1%_0.0625W_100PPM, Pin Count=2, PressFit=No, Sense=No, SMD=Yes, Socket=No, Status="Not Recommended", TC=±100ppm/°C
R8: library part R0402_330R_1%_0.0625W_100PPM, "Resistor - 1%", Case=0402, Manufacturer=GENERIC, Manufacturer1 ComponentHeight=0.4mm, Manufacturer1 Example="YAGEO PHYCOMP", Manufacturer1 Part Number=232270673301L, Power=0.0625W, Tolerance=±1%, Author="CERN DEM JLC", Component Type=Standard, CreateDate=03.12.2007, HelpURL=\\cern.ch\dfs\Applications\Altium\Datasheets\R0402_Phycomp_RC0402.pdf, LatestRevisionDate=17.10.2012, Manufacturer Part Number=R0402_330R_1%_0.0625W_100PPM, Mounted=Yes, Part Description="General Purpose Thick Film Chip Resistor", Part Number=R0402_330R_1%_0.0625W_100PPM, Pin Count=2, PressFit=No, Sense=No, SMD=Yes, Socket=No, Status="Not Recommended", TC=±100ppm/°C
R9: library part R0402_1K_1%_0.0625W_100PPM, "Resistor - 1%", Case=0402, Manufacturer=GENERIC, Manufacturer1 ComponentHeight=0.4mm, Manufacturer1 Example="YAGEO PHYCOMP", Manufacturer1 Part Number=232270671002L, Power=0.0625W, Tolerance=±1%, Author="CERN DEM JLC", Component Type=Standard, CreateDate=03.12.2007, HelpURL=\\cern.ch\dfs\Applications\Altium\Datasheets\R0402_Phycomp_RC0402.pdf, LatestRevisionDate=17.10.2012, Manufacturer Part Number=R0402_1K_1%_0.0625W_100PPM, Mounted=Yes, Part Description="General Purpose Thick Film Chip Resistor", Part Number=R0402_1K_1%_0.0625W_100PPM, Pin Count=2, PressFit=No, Sense=No, SMD=Yes, Socket=No, Status="Not Recommended", TC=±100ppm/°C
R10: library part R0402_15K_1%_0.0625W_100PPM, "Resistor - 1%", Case=0402, Manufacturer=GENERIC, Manufacturer1 ComponentHeight=0.4mm, Manufacturer1 Example=VISHAY, Manufacturer1 Part Number=CRCW040215K0FKED, Power=0.0625W, Tolerance=±1%, Author="CERN DEM JMW", Component Type=Standard, CreateDate=06.07.2015, HelpURL="\\cern.ch\dfs\Applications\Altium\Datasheets\R0402_VISHAY_CRCW e3.pdf", LatestRevisionDate=06.07.2015, Manufacturer Part Number=R0402_15K_1%_0.0625W_100PPM, Mounted=Yes, Part Description="General Purpose Thick Film Chip Resistor", Part Number=R0402_15K_1%_0.0625W_100PPM, Pin Count=2, PressFit=No, Sense=No, SMD=Yes, Socket=No, Status=None, TC=±100ppm/°C
R11 R12: library part CMP-2002-03387-1, Manufacturer="TE Connectivity / AMP", Part Number=CPF0402B7K68E1
R13 R14 R16 R17: library part R0402_20K_1%_0.0625W_100PPM, "Resistor - 1%", Case=0402, Manufacturer=GENERIC, Manufacturer1 ComponentHeight=0.4mm, Manufacturer1 Example="YAGEO PHYCOMP", Manufacturer1 Part Number=232270672003L, Power=0.0625W, Tolerance=±1%, Author="CERN DEM JLC", Component Type=Standard, CreateDate=03.12.2007, HelpURL=\\cern.ch\dfs\Applications\Altium\Datasheets\R0402_Phycomp_RC0402.pdf, LatestRevisionDate=17.10.2012, Manufacturer Part Number=R0402_20K_1%_0.0625W_100PPM, Mounted=Yes, Part Description="General Purpose Thick Film Chip Resistor", Part Number=R0402_20K_1%_0.0625W_100PPM, Pin Count=2, PressFit=No, Sense=No, SMD=Yes, Socket=No, Status="Not Recommended", TC=±100ppm/°C
R15 R19: library part R0402_10K_1%_0.0625W_100PPM, "Resistor - 1%", Case=0402, Manufacturer=GENERIC, Manufacturer1 ComponentHeight=0.4mm, Manufacturer1 Example="YAGEO PHYCOMP", Manufacturer1 Part Number=232270671003L, Power=0.0625W, Tolerance=±1%, Author="CERN DEM JLC", Component Type=Standard, CreateDate=03.12.2007, HelpURL=\\cern.ch\dfs\Applications\Altium\Datasheets\R0402_Phycomp_RC0402.pdf, LatestRevisionDate=17.10.2012, Manufacturer Part Number=R0402_10K_1%_0.0625W_100PPM, Mounted=Yes, Part Description="General Purpose Thick Film Chip Resistor", Part Number=R0402_10K_1%_0.0625W_100PPM, Pin Count=2, PressFit=No, Sense=No, SMD=Yes, Socket=No, Status="Not Recommended", TC=±100ppm/°C
R18: library part R0402_100R_1%_0.0625W_100PPM, "Resistor - 1%", Case=0402, Manufacturer=GENERIC, Manufacturer1 ComponentHeight=0.4mm, Manufacturer1 Example="YAGEO PHYCOMP", Manufacturer1 Part Number=232270671001L, Power=0.0625W, Tolerance=±1%, Author="CERN DEM JLC", Component Type=Standard, CreateDate=03.12.2007, HelpURL=\\cern.ch\dfs\Applications\Altium\Datasheets\R0402_Phycomp_RC0402.pdf, LatestRevisionDate=17.10.2012, Manufacturer Part Number=R0402_100R_1%_0.0625W_100PPM, Mounted=Yes, Part Description="General Purpose Thick Film Chip Resistor", Part Number=R0402_100R_1%_0.0625W_100PPM, Pin Count=2, PressFit=No, Sense=No, SMD=Yes, Socket=No, Status="Not Recommended", TC=±100ppm/°C
R20: library part R0402_1K2_1%_0.0625W_100PPM, "Resistor - 1%", Case=0402, Manufacturer=GENERIC, Manufacturer1 ComponentHeight=0.4mm, Manufacturer1 Example="YAGEO PHYCOMP", Manufacturer1 Part Number=232270671202L, Power=0.0625W, Tolerance=±1%, Author="CERN DEM JLC", Component Type=Standard, CreateDate=03.12.2007, HelpURL=\\cern.ch\dfs\Applications\Altium\Datasheets\R0402_Phycomp_RC0402.pdf, LatestRevisionDate=17.10.2012, Manufacturer Part Number=R0402_1K2_1%_0.0625W_100PPM, Mounted=Yes, Part Description="General Purpose Thick Film Chip Resistor", Part Number=R0402_1K2_1%_0.0625W_100PPM, Pin Count=2, PressFit=No, Sense=No, SMD=Yes, Socket=No, Status="Not Recommended", TC=±100ppm/°C
T1: "NPN Transistor", Case=SOT23-3, Manufacturer="NXP SEMICONDUCTORS", Author="CERN DEM JLC", Bonding=No, ComponentHeight=1.1mm, Component Type=Standard, CreateDate=14.06.2011, Device=BC847B, HelpURL=\\cern.ch\dfs\Applications\Altium\Datasheets\BC847B.pdf, LatestRevisionDate=14.06.2011, Manufacturer Part Number=BC847B, Mounted=Yes, PackageDescription="SOT23, 0.95mm Pitch; 3 Pin, 1.30mm W X 2.90mm L X 1.10mm H body, IPC Medium Density", Part Description="45V 100mA NPN general-purpose transistors", Part Number=BC847B, Pin Count=3, PressFit=No, Sense=No, SMD=Yes, Socket=No
T2: "N-CHANNEL MOSFET WITH DIODE", Case=SOT23-3, Manufacturer="ON SEMICONDUCTOR", Author="CERN DEM JLC", Bonding=No, Component Type=Standard, ComponentHeight=1.11mm, CreateDate=23.03.2009, Device=BSS138LT1G, HelpURL=\\cern.ch\dfs\Applications\Altium\Datasheets\BSS138LT1G.pdf, LatestRevisionDate=23.03.2009, Manufacturer Part Number=BSS138LT1G, Mounted=Yes, PackageDescription="SOT23, 0.95mm Pitch; 3 Pin, 1.40mm W X 3.00mm L X 1.10mm H body, IPC Medium Density", Part Description="50V 200mA N-Channel Enhancement Mode Field-Effect Transistor", Part Number=BSS138LT1G, Pin Count=3, PressFit=No, Sense=No, SMD=Yes, Socket=No
U1: library part CMP-04916-000005-1, "IC VREF SERIES 0.05% SOT23-6", Ambient Temperature Range High=+125°C, Ambient Temperature Range Low=-40°C, Manufacturer="Texas Instruments", Max Supply Voltage=12V, Nominal Supply Current=72uA, Output Current=10mA, Output Voltage=2.5V, Package=DBV0006A, Temperature="-40°C to +125°C", Automotive=Yes, Automotive Grade="Grade 1", Category=IC, ComponentLink2Description=Datasheet, ComponentLink2URL=https://www.ti.com/lit/ds/symlink/ref34-q1.pdf, Device Class L1="Integrated Circuits (ICs)", Device Class L2="Power Management ICs", Device Class L3="Voltage References", Digikey Description="IC VREF SERIES 0.05% SOT23-6", Height=1.45mm, Lead Free=Yes, Manufacturer Part Number=REF3425QDBVRQ1, Mouser Description="Automotive low-drift low-power small-footprint series voltage reference 6-SOT-23 -40 to 125", Number Of Outputs=1, Octopart=https://octopart.com/ref3433qdbvrq1-texas+instruments-95842010, Output Type=Fixed, Reference Type=Series, RoHS=TRUE, Standoff Height=0mm, Temperature Range High=+125°C, Temperature Range Low=-40°C
VCSEL1: library part VCSLE_BW10

## Via types
v1: diameter 19.68, hole 11.81, Top Layer to Bottom Layer, tented both sides, 41 vias

## Nets (pads, with @x,y where several pads share a name; then routed paths per layer and width w, separated by ;. In a path a pad name is that pad's centre, name@x,y a point inside that pad or via, vN(x,y) a via of type N, cw(c..) or ccw(c..) an arc to the next point about the centre after c; other vN are vias at no path point)
3V3_VDD: P4.1
ADC1: ADN1.9 P2.5 | length 1648.2
  Top Layer w10: 1565.26,2668 1585.52,2668 ADN1.9 1544.92,2667.92 1521.85,2644.85 1521.85,2640.34 1519,2637.49 1519,2260.53 1751.97,2027.56 1958.66,2027.56 2017.72,2086.61 2017.72,2401.57 2066.93,2450.79 2116.14,2450.79 2185.04,2519.68 P2.5
ADC2: ADN1.11 P2.1 | length 1020
  Top Layer w10: v1@1562.04,2625.96 v1(1565.15,2625.96) 1567.77,2625.96 1570.29,2628.47 1585.52,2628.47 ADN1.11 ; v1(1791.34,2460.63) 1907.92,2460.63 1962.29,2515 2012.56,2515 2047.24,2480.32 2106.3,2480.32 2135,2509.02 2135,2687.76 P2.1
  Bottom Layer w10: v1(1565.15,2625.96) 1565.15,2569.09 1575.18,2559.06 1614.17,2559.06 1624.02,2568.9 1712.6,2568.9 1791.34,2490.16 v1(1791.34,2460.63)
ADC3: ADN1.21 P2.6 R2.2 R4.2 R10.1 | length 521.6
  Top Layer w10: ADN1.21 1782.81,2648.24 1796.75,2634.3 R10.1 1797.53,2585.31 R4.2 1801.04,2523.78 R2.2 1804.01,2489.99 1809.87,2484.13 1886.13,2484.13 1939.8,2537.8 P2.6@2095.67,2537.8
EN: P4.4 R22.2 T2.1 | length 684.2
  Top Layer w10: T2.1 1517.72,2007.09 1523.57,2001.23 1524.36,2001.23 1536.61,1988.98 R22.2 1542.95,1981.85 1542.95,1960.98 1550.2,1953.74 1589.57,1953.74 1688.23,1855.08 1956.76,1855.08 1971.92,1870.24 2083.31,1870.24 P4.4
GND: ADN1.7 ADN1.12 ADN1.13 ADN1.18 ADN1.19 ADN1.25 C5.1 C6.2 C7.1 C8.2 C9.2 C10.1 C13.2 D1.2 D2.1 J2.3 P2.3 P2.4 P3.2 P3.3 P4.2 R5.1 R8.1 R9.2 R16.1 R17.1 R19.1 R22.1 T2.2 U1.4 VCSEL1.4 VCSEL1.6 | length 710.2
  Top Layer w10: R5.1 1503.53,2772.07 1502.69,2771.22 1502.69,2749.84 v1(1522.53,2730) ; v1@1518.29,2730 1519.66,2728.63 1539.56,2728.63 1545.7,2722.49 1562.69,2722.49 ADN1.7@1577.8,2707.37 ; C10.1@1552.11,2391.92 1553.48,2393.3 1575.67,2393.3 v1(1577.05,2391.92) ; R22.1 v1(1594.49,1988.19) ; C6.2@1584.1,2786.8 1591.31,2779.6 1591.31,2764.58 v1(1589.53,2762.8) ; v1@1585.57,2577.84 ADN1.12@1585.57,2608.84 ; v1(1585.53,2578.9) 1585.81,2578.63 1616.03,2578.63 1616.11,2578.55 ADN1.13 ; T2.2 v1(1592.52,2084.65) ; C5.1@1665.53,2481.69 1665.98,2481.25 1688.09,2481.25 v1(1688.53,2480.8) 1688.98,2481.25 1714.09,2481.25 C7.1@1714.53,2481.69 ; ADN1.18 1714.53,2578.16 1714.61,2578.08 1742.26,2578.08 v1(1742.53,2577.8) 1743.79,2579.06 1743.79,2608.79 1743.87,2608.87 ADN1.19 ; R8.1 1731.54,2833.3 1751.04,2833.3 v1(1752.53,2834.8) ; R16.1 1839.31,2751.53 1855.22,2751.53 v1(1857,2749.75) ; v1@1857.85,2754.15 1874.69,2754.15 R17.1 ; U1.4 1867.4,1904.91 1874.21,1911.72 1896.16,1911.72 ; v1(1896.16,1938) 1896.16,1911.72 ; C13.2@1924,1911.72 1896.16,1911.72 ; R19.1 1967.32,1809.84 v1(2007.87,1850.39) ; v1(2009,2815.12) 2010.1,2814.02 2010.1,2790.14 R9.2
  other v1: 1623,2617 1702,2618 1665.32,2658.08 1705,2696 1628,2697 1895.44,2826.94
LD-: D1.1 J2.1 VCSEL1.2 | length 312.2
  Top Layer w20: VCSEL1.2 1913,2275 J2.1 1924,2376.87 1899.29,2401.57 D1.1
N12V: C12.2 C13.1 P1.2 P1.3 P4.3 R20.1 U1.1 U1.2 | length 1196.3
  Top Layer w10: v1(1986.5,2007.35) 1986.5,1978.85 R20.1
  Top Layer w20: v1(1715.69,1888.02) C12.2@1735.99,1888.02 ; v1(1791,1762) 1791,1800.22 U1.1 ; v1(1830,1757.99) U1.2 ; C13.1@1924,1876.28 1925.02,1875.26 v1(1948.66,1875.26)
  Bottom Layer w30: P1.2 P1.3 1664.17,1816.25 1676.73,1828.8 1676.73,1834.21 1715.69,1873.17 v1(1715.69,1888.02) 1758.12,1845.6 1758.12,1794.88 1795.01,1757.99 1876.1,1757.99 1948.66,1830.55 ; v1@1948.66,1869.92 1948.66,1833.6 1966.23,1816.02 2127.95,1816.02 2180.43,1868.5 P4.3 ; v1(1948.66,1875.26) 1948.66,1969.5 v1(1986.5,2007.35)
NetADN1_1: ADN1.1 C1.1 C2.2 R2.1 R3.2 | length 586.9
  Top Layer w10: ADN1.1 1714.53,2745.52 1725.79,2756.78 ; C2.2 1737.05,2774.6 1737.05,2768.03 1725.79,2756.78 ; v1(1747.78,2732.03) 1747.78,2734.65 1731.78,2750.65 1731.78,2753.59 1728.6,2756.78 1725.79,2756.78 ; R2.1 1878.01,2533.76 1896.49,2533.76 1940.05,2577.32 1940.05,2586.6 C1.1 1969.46,2616.01 v1@1969.46,2685.88 ; v1(1968.73,2688.84) 1968.73,2691.46 1971.18,2693.91 R3.2@1971.18,2724.94
  Bottom Layer w10: v1(1747.78,2732.03) 1777.8,2702.01 1916.21,2702.01 1929.37,2688.84 v1(1968.73,2688.84)
NetADN1_2: ADN1.2 C2.1 C3.1 C4.1 | length 206.2
  Top Layer w10: ADN1.2 1694.85,2767.84 C2.1 1722.05,2795.03 1722.05,2798.15 1727.9,2804.01 1793.33,2804.01 C3.1 1794.53,2861.28 C4.1
NetADN1_3: ADN1.3 R7.1 R8.2 | length 140.4
  Top Layer w10: ADN1.3 1675.16,2795.43 1686.61,2806.88 1686.61,2825.39 R8.2 R7.1
NetADN1_4: ADN1.4 R5.2 R6.2 | length 262.1
  Top Layer w10: R5.2 1542.32,2837.31 1560.82,2855.8 1629.09,2855.8 1641.74,2843.15 1641.74,2828.23 1655.48,2814.49 ADN1.4
NetADN1_5: ADN1.5 C6.1 R1.1 | length 96.1
  Top Layer w10: R1.1 1619.93,2826.41 1619.93,2787.2 1619.53,2786.8 1635.79,2770.54 ADN1.5
NetADN1_8: ADN1.8 R21.1 T2.3 | length 649.9
  Top Layer w10: R21.1@1496.06,2655.9 1496.06,2240.8 1555.12,2181.74 T2.3 ; R21.1 1500.43,2655.9 1535.02,2690.48 1568.22,2690.48 1571.02,2687.69 1585.52,2687.69 ADN1.8
NetADN1_14: ADN1.14 L1.1 | length 90.6
  Top Layer w10: L1.1 1620.84,2503.62 1620.84,2535.61 1635.79,2550.56 ADN1.14
NetADN1_20: ADN1.20 DL1.2 | length 350
  Top Layer w10: ADN1.20 1745.12,2628.47 1762.68,2628.47 v1(1768.53,2622.62) ; v1(1992,2605) 1992,2607.62 2000.45,2616.07 2000.45,2626.29 DL1.2
  Bottom Layer w10: v1(1768.53,2622.62) 1815.53,2622.62 1879.92,2687.01 1909.99,2687.01 v1(1992,2605)
NetADN1_22: ADN1.22 R10.2 R11.1 R12.2 | length 125
  Top Layer w10: ADN1.22 1745.12,2668 R11.1@1833.01,2668 ; R12.2 R11.1
NetADN1_23: ADN1.23 R14.1 R17.2 | length 188.3
  Top Layer w10: ADN1.23 1772.84,2687.61 1777.53,2692.29 1781.1,2692.29 1781.53,2692.73 1851.69,2692.73 1851.79,2692.63 1862.65,2692.63 1868.51,2698.49 1868.51,2709.88 1874.93,2716.3 R17.2 1875.78,2716.05 1914.29,2716.05 R14.1
NetADN1_24: ADN1.24 R13.1 R16.2 | length 96.2
  Top Layer w10: ADN1.24 1772.84,2707.29 1775.43,2709.88 1794.12,2709.88 R13.1 R16.2
NetC1_2: C1.2 R4.1 | length 52.8
  Top Layer w10: R4.1 1876.03,2593.8 C1.2
NetC3_2: C3.2 C4.2 R3.1 | length 248.4
  Top Layer w10: C3.2 1853.59,2856.33 1856.06,2858.8 1935.53,2858.8 1955.53,2838.8 1955.53,2778.38 R3.1
NetC12_1: C12.1 T1.1 U1.6 | length 133.1
  Top Layer w10: T1.1 1763.2,1964.13 1742.2,1943.13 1742.2,1923.92 1735,1916.72 1785.79,1916.72 1792.6,1909.91 U1.6
NetDL1_1: DL1.1 R9.1 | length 52
  Top Layer w10: DL1.1 R9.1
NetJ2_2: J2.2 T1.3 | length 224.4
  Top Layer w20: T1.3 1800.6,2147.6 1839,2186 J2.2
NetP1_1: P1.1 R18.1 R20.2 | length 308.9
  Top Layer w10: P1.1 1665.75,2007.87 1905.91,2007.87 1911.77,2002.02 1911.77,1984.69 R18.1 R20.2
NetR12_1: R12.1 R15.2 | length 37.2
  Top Layer w10: R12.1 1872.36,2634.91 1909.22,2634.91 R15.2
NetR18_2: R18.2 T1.2 U1.5 | length 116.9
  Top Layer w10: U1.5 1834,1908.18 1834,1968 T1.2 1844.35,1978.35 R18.2
P5V7: ADN1.15 ADN1.16 C5.2 P2.2 R1.2 R21.2 | length 1302.9
  Top Layer w10: v1(1496.06,2716.54) 1497.85,2714.74 1497.85,2698.28 1496.06,2696.49 R21.2 ; R1.2 1583.31,2835.85 v1(1583.42,2835.96) ; C5.2@1655.48,2527.77 ADN1.15 ; C5.2@1675.16,2527.35 ADN1.16
  Bottom Layer w39.37: v1(1682,2523) 1677,2518 1554.19,2518 1488,2584.19 1488,2716.54 1487.84,2716.69 1487.84,2777.37 1546.44,2835.96 v1(1583.42,2835.96) 1627.81,2880.35 2027.56,2880.35 2063.42,2844.49 2063.42,2759.42 P2.2
  other v1: 1645,2526
RT+: R11.2 VCSEL1.5 | length 898.5
  Top Layer w10: VCSEL1.5 1664.05,2172.95 1670,2167 1759,2167 1824,2232 1972,2232 1991,2251 1991,2440 1984.88,2446.12 1984.88,2455.49 1969.78,2470.6 v1(1969.78,2473.22) ; R11.2 1876.65,2667.41 1901.53,2667.41 v1(1903.39,2665.55)
  Bottom Layer w10: v1(1903.39,2665.55) 1905,2663.94 1905,2619 1966,2558 1966,2503.06 1969.78,2499.28 v1(1969.78,2473.22)
TEC+: ADN1.17 C7.2 VCSEL1.1 | length 305.2
  Top Layer w15: ADN1.17 1694.85,2543.06 1707.86,2530.05 1707.86,2524.39 1714.34,2517.91 1743.09,2517.91 1751.87,2509.13 1751.87,2492.13 1749.31,2489.57 1749.31,2419.31 1730.71,2400.71 VCSEL1.1
TEC-: ADN1.10 C10.2 L1.2 VCSEL1.7 | length 476.8
  Top Layer w15: C10.2@1551.04,2429 1551.04,2575.86 1542.81,2584.09 1542.81,2635.21 1555.89,2648.3 ADN1.10@1580.3,2648.3 ; C10.2@1551.27,2429 1657,2429 1682.36,2403.64 VCSEL1.7
TUNING_VT-: D2.2 P3.1 VCSEL1.3 | length 829.3
  Top Layer w30: P3.1 2202.52,2344.72 2222.3,2344.72 2244.09,2322.93 2244.09,2175.2 2237.56,2168.66 2237.56,2128.7 D2.2
  Bottom Layer w10: VCSEL1.3 1756.69,2222.69 1949,2415 2138,2415 2185.04,2367.96 P3.1
V_REF: ADN1.6 C8.1 C9.1 R6.1 R7.2 R13.2 R14.2 R15.1 | length 958.5
  Top Layer w10: v1(1522.53,2763) 1522.68,2762.84 1540.93,2762.84 C9.1@1541.53,2762.24 ; R6.1 C9.1@1541.53,2762.24 ; ADN1.6 1586.47,2737.8 1569.69,2754.59 1569.69,2756.38 1563.83,2762.24 C9.1@1541.53,2762.24 ; v1(1663.39,2834.65) 1663.39,2878.92 1677.47,2893.01 1708.59,2893.01 1714.45,2887.15 1714.45,2886.39 R7.2 ; v1(1771.65,2768.62) 1785.22,2768.62 R13.2@1800.29,2753.56 ; v1@1915,2773.63 1948.89,2739.73 1948.89,2634.57 R15.1@1948.64,2634.32
  Top Layer w20: R14.2@1914.03,2753.31 1915,2754.28 1915,2773.63 C8.1
  Bottom Layer w10: 1654.98,2795.28 1661.4,2801.7
  Bottom Layer w20: v1(1522.53,2763) 1532.68,2763 1564.96,2795.28 1654.98,2795.28 1745,2795.28 v1(1771.65,2768.62) 1777.62,2774.59 v1(1914.03,2774.59) ; 1661.4,2801.7 1661.4,2832.66 v1(1663.39,2834.65)
VCSEL_ON: R19.2 U1.3 | length 81.2
  Top Layer w10: U1.3 1867.4,1791.98 1887.72,1771.65 R19.2
pads on no net: P3.4
copper on no net:
  other v1: 1798,1953

## Polygon pours and split planes (outlines as drawn)
GND on Bottom Layer "GND_L02_P000" (solid, remove dead copper, pour order 0): 1476.38,2893.7 2263.78,2893.7 2263.78,1751.97 1476.38,1751.97
GND on Top Layer "GND_L01_P001" (solid, remove dead copper, pour order 1): 1476.38,2893.7 2263.78,2893.7 2263.78,1751.97 1476.38,1751.97

## Keep-outs
Keep-Out Layer:
  the board outline again, w10

## Text inside footprints (layer, text, board x,y; h text height)
P2: Top Overlay "2" at 2103.86,2779.43 h40 r90; Top Overlay "6" at 2103.54,2461.81 h40 r90; Top Overlay "5" at 2205.91,2461.81 h40 r90; Top Overlay "1" at 2205.91,2790.16 h40 r90
P3: Top Overlay "3" at 2205.91,2186.22 h40 r90; Top Overlay "4" at 2103.54,2186.22 h40 r90; Top Overlay "2" at 2103.54,2414.57 h40 r90; Top Overlay "1" at 2205.91,2414.57 h40 r90
P4: Top Overlay "3" at 2205.91,1792.52 h40 r90; Top Overlay "4" at 2103.54,1792.52 h40 r90; Top Overlay "2" at 2103.54,2020.87 h40 r90; Top Overlay "1" at 2205.91,2020.87 h40 r90